# Altium PCB WX0.012.615PCB-4.2.PcbDoc (part 2 of 2)
Units mil, origin at the board's own origin, x right, y up, seen from the top; angles counter-clockwise.
Board outline 3994.73 x 11120.28 mil, 2 copper layers (Top Layer, Bottom Layer), stack 62.249 mil thick; 155 components, 122 nets, 589 pads, 368 vias.
Unrouted connection lines stored in the file: 340.
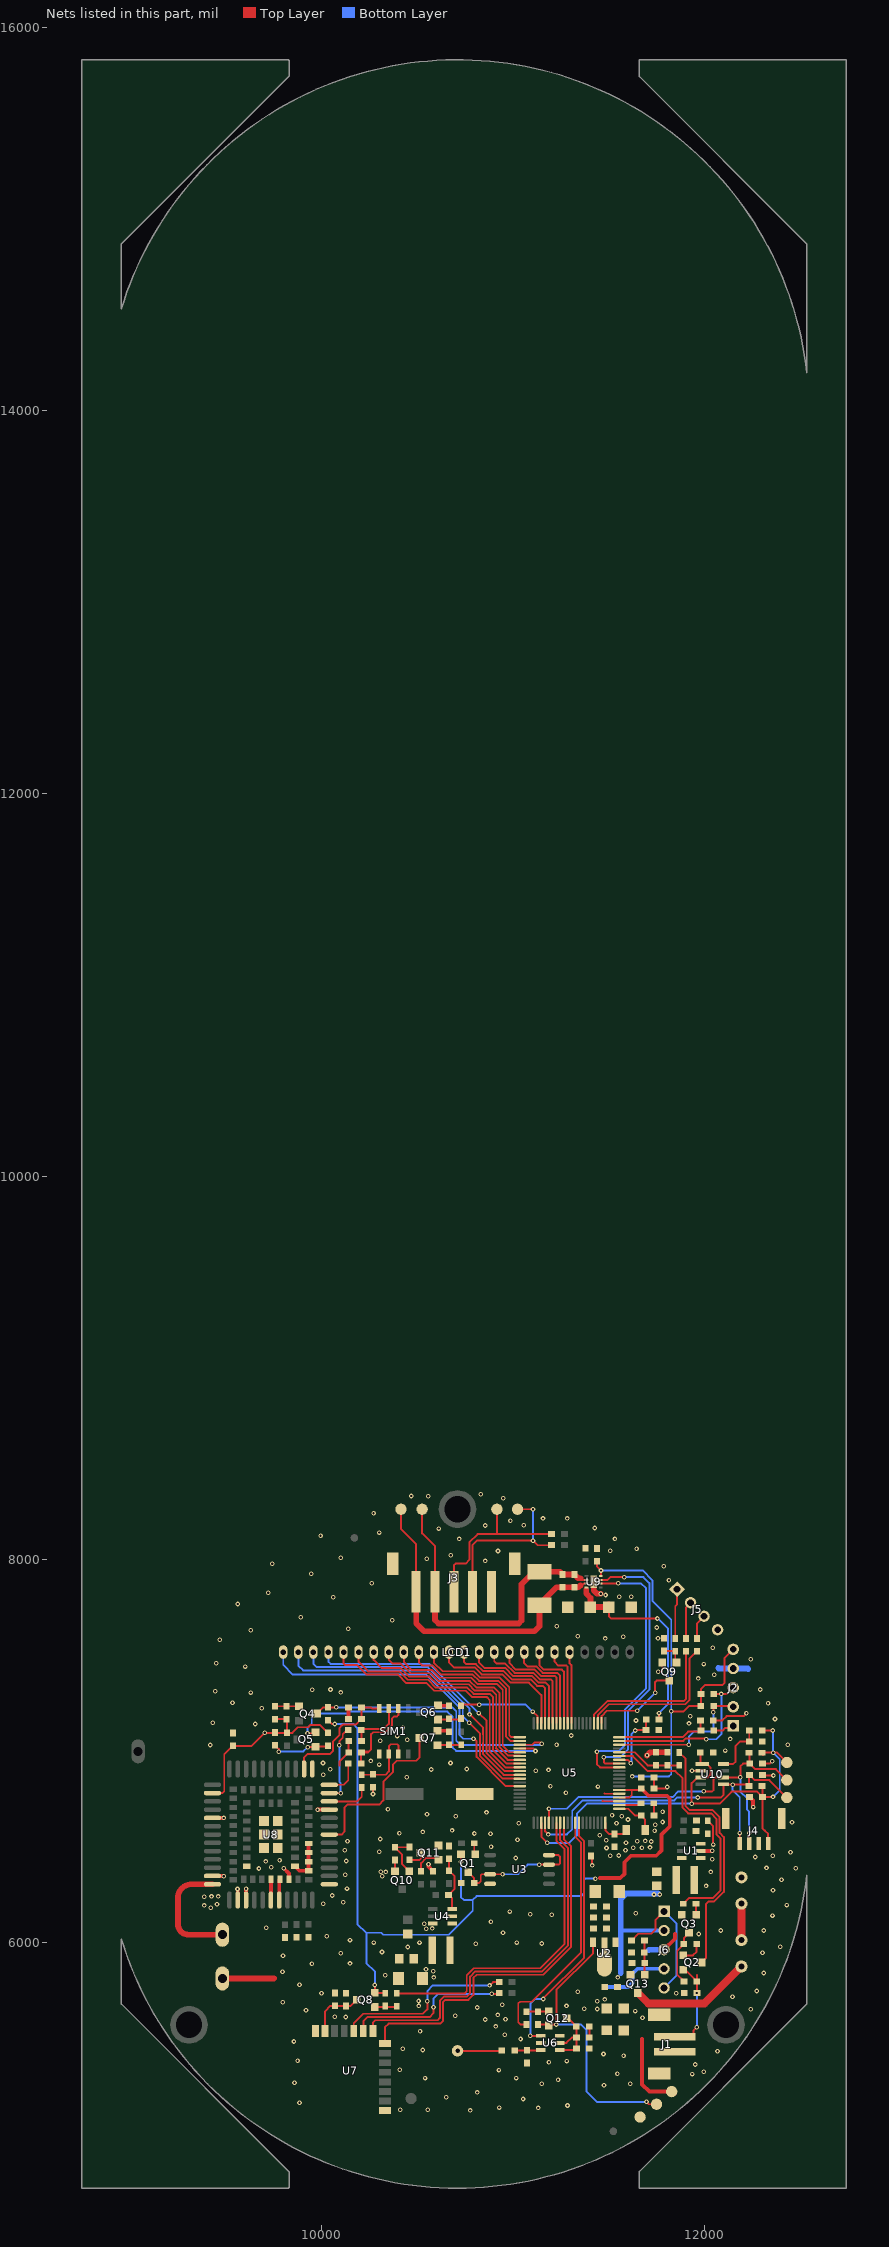
[diagram p2: the nets of this part, all layers, seen from the top]

## Via types
v1: diameter 24, hole 12, Top Layer to Bottom Layer, tented both sides, 368 vias

## Nets (pads, with @x,y where several pads share a name; then routed paths per layer and width w, separated by ;. In a path a pad name is that pad's centre, name@x,y a point inside that pad or via, vN(x,y) a via of type N, cw(c..) or ccw(c..) an arc to the next point about the centre after c; other vN are vias at no path point) (continued)
GND: C1.1 C2.2 C3.1 C4.2 C5.2 C6.2 C7.2 C9.2 C10.2 C11.2 C12.1 C13.1 C14.1 C15.2 C16.2 C17.1 C18.2 C19.2 C21.2 C22.1 C23.2 C24.1 C25.1 C26.1 C27.2 C28.2 C29.1 C32.2 C33.2 C34.1 C35.2 C36.1 C37.2 C38.2 C39.1 C40.2 C41.1 C42.1 C43.2 C44.2 C47.2 C48.2 C50.2 G.1 J1.2 J1.3 J1.4 J2.4 J3.1 J3.6 J3.7 J4.2 J4.5 J4.6 J5.4 J6.3 Q3.2 Q6.2 Q7.2 Q9.2 Q11.2 R9.1 R11.1 R12.2 R22.1 R26.2 R34.2 R40.1 R41.1 R42.2 R47.1 R50.1 R51.1 SIM1.1 U1.2 U2.1 U3.4 U4.2 U5.63 U5.65 U6.2 U6.6 U7.1 U7.15 U8.1 U8.10 U8.27 U8.34 U8.36 U8.37 U8.40 U8.41 U8.45 U8.46 U8.47 U8.48 U8.70 U8.71 U8.72 U8.73 U8.88 U8.89 U8.90 U8.91 U8.92 U8.93 U8.94 U8.95 U9.9 U10.2 W1.2 | length 3197.1
  Top Layer w10: v1@9490.02,6344.98 v1(9491,6344) ; 10096,6922 10096,6943.57 C42.1@10143,6990.57 ; C42.1@10140,6993.57 10143,6996.57 C39.1@10143,7055.43 ; v1(10270,6773) C41.1@10270,6809 ; C28.2@11399.51,5559 11400.51,5558 C27.2@11400.51,5502 ; R50.1@11408,6449 11415,6442 v1(11415,6400) ; 11470,6737 11471.64,6735.36 U5.63@11556.84,6735.36 ; 11480,6775 11480.27,6774.73 U5.65@11556.84,6774.73 ; C13.1@11737,6725 11737,6661 C12.1@11738,6660 ; C14.1@11738,6860 C17.1@11738,6803 11800,6803 v1(11807,6810) ; v1(11760,7412) 11777,7412 11781,7416 Q9.2@11781,7460 ; v1(11936.72,6894.72) U10.2@11982.94,6894.72 ; R51.1@12019,6633 12047,6605 v1(12047,6509) ; C24.1@12047.86,7158 12095,7158 12117,7180 12206,7180 v1(12221,7195) ; C36.1@12304.49,6873.33 12307.82,6870 v1(12362,6870) ; C33.2@12305,6932 12343,6932 v1(12356,6945)
  Top Layer w20: U8.34@9431.42,6344.98 v1@9490.02,6344.98 ; U8.27@9431.42,6648.13 v1(9490,6648.13) ; v1(9562,6277) 9563.31,6275.69 U8.36@9563.31,6219 ; U8.37@9606.61,6219 9606.61,6277.61 v1(9607,6278) ; U8.40@9736.54,6219 U8.70@9736.54,6327.27 ; U8.41@9779.84,6219 9779.84,6323.33 U8.71@9783.78,6327.27 ; v1(9804,6385) 9831.02,6357.98 U8.72@9831.02,6327.27 ; U8.73@9862.52,6396.17 9886.14,6372.54 U8.45@9933.39,6372.54 U8.47@9933.39,6467.03 U8.48@9933.39,6514.28 ; v1(9980.56,6691.44) U8.10@10041.65,6691.44 ; C43.2@10142.49,7166.14 C44.2@10142.49,7225 ; 10563,6391 10560,6394 ; R9.1@10584,6370 v1@10560,6394 ; Q7.2@10607.24,7103.4 10660.6,7103.4 R26.2@10666,7098 ; Q6.2@10609.24,7237.4 10612.65,7234 R22.1@10667,7234 ; J6.3@11791,5960 11848,6017 11848,6043 ; U1.2@11982,6476 v1(12042,6476) ; C35.2@12237.49,6758 12256,6739.49 v1(12256,6705) ; 10560,6394 v1(10560,6406) v1@10560,6394
  Top Layer w30: W1.2@9483,5809.65 9751.65,5809.65 9753,5811 ; U9.9@11423,7882 11423,7837 11440.04,7819.96 v1(11459.78,7819.96) ; v1(11702,6975) 11718,6991 R12.2@11809,6991
  Bottom Layer w30: 11710,5957 11713,5960 J6.3@11791,5960 ; 12074,7431 12076,7429 J2.4@12152,7429 12228,7429 12231,7426
  other v1: 10778,5120 10413,5124 10556,5124 11133,5133 10929,5135 11286,5146 9886,5160 11054,5180 10653,5189 10814,5214 11477,5251 11152,5259 11614,5259 9860,5265 11237,5281 10542,5289 11019,5289 11938,5310 11547,5312 11998,5322 10928,5331 10409,5333 11953,5360 11189,5372 11282,5378 9876,5379 11579,5405 11474,5415 12070,5429 10530,5436 10426,5443 9857,5480 11041,5493 10958,5516 10516,5534 10911,5559 10856,5595 10962,5597 11678,5604 10128,5608 10070,5609 10699,5615 10922,5619 11640,5639 9920,5643 12244,5649 11374,5651 10814,5658 10509,5666 11281,5666 10946,5672 9798,5685 10508,5692 12148,5714 10001,5732 11854,5732 11339,5740 12275,5744 9886,5776 10334,5827 12311,5838 9797,5844 9951,5886 10150,5888 9800,5928 10102,5941 12305,5944 10317,5948 10452,5974 12398,5975 10807,5991 11152,5992 10274,5997 10513,5997 11021,5997 10150,6010 10028,6030 11972,6042 10949,6048 12087,6060 12311,6060 9712,6074 10886,6106 12357,6138 11204,6143 11092,6145 11642,6150 10984,6159 9423,6179 9388,6191 12432,6193 9455,6197 10010,6200 10114,6208 9388,6236 9426,6238 9462,6238 10057,6243 12360,6270 10134,6279 12010,6293 12404,6326 10125,6351 12034,6366 9674,6384 12478,6385 12326,6387 9738,6390 9709,6421 10130,6423 9782,6427 12043,6433 11016,6439 12267,6444 12359,6450 11509,6451 11554,6452 12451,6469 10302,6472 10123,6480 11589,6480 11490,6491 11630,6492 11675,6492 11717,6494 10887,6497 11592,6519 11724,6525 11651,6526 10137,6527 11692,6528 11489,6532 11025,6534 10308,6538 11455,6557 10884,6566 10800,6567 10408,6568 10530,6575 11741,6581 10683,6583 11744,6612 11031,6620 11542,6620 12459,6625 11783,6627 11602,6640 10703,6657 11570,6657 11519,6662 10552,6668 10863,6677 11783,6680 10348,6693 11278,6780 11445,6812 11197,6813 10447,6860 10010,6874 11121,6894 11187,6899 10574,6901 10046,6903 10760,6904 10303,6927 10009,6935 10675,6935 10259,6946 12111,7000 9420,7029 11229,7030 12437,7030 10308,7052 10449,7057 12137,7061 10397,7076 11306,7079 10426,7119 9655,7139 11921,7142 9432,7145 11644,7157 12370,7165 11927,7180 9688,7221 12334,7248 9536,7250 9631,7303 10102,7304 9446,7310 9953,7318 10048,7319 12293,7319 11970,7377 12053,7396 9603,7439 11998,7452 9451,7457 12243,7478 12045,7537 9470,7579 11484,7586 11759,7587 11578,7595 11339,7597 9631,7629 10140,7637 11753,7643 11230,7649 10370,7681 9892,7696 9563,7766 10063,7801 11556,7803 11619,7803 11485,7813 9722,7825 10263,7874 11816,7890 9947,7924 11789,7963 9743,7976 10856,7991 10551,8002 10101,8007 10676,8021 10923,8043 11510,8044 11647,8055 10721,8106 11534,8106 9996,8122 10303,8139 10613,8160 11428,8163 10857,8176 11058,8178 10988,8201 11158,8213 11285,8213 10273,8240 10951,8319 10558,8329 10470,8330 10833,8339
GPRS_RST: R20.1 U5.19 | length 462.8
  Top Layer w10: R20.1@10730,7235 10735,7240 v1(10825,7240) ; v1(11104,7204) 11129.68,7178.32 U5.19@11129.68,7142.84
  Bottom Layer w10: v1(10825,7240) 11068,7240 v1(11104,7204)
KEY: U5.53 U6.1 | length 1320.3
  Top Layer w10: v1(11092.2,5509.8) U6.1@11146,5509.8 ; v1(11160,5702) 11160,5706 11373,5919 11373,6527.25 11346.21,6554.04 U5.53@11346.21,6623.16
  Bottom Layer w10: v1(11092.2,5509.8) 11092.2,5678.2 11116,5702 v1(11160,5702)
Key_On: R15.2 U5.52 | length 1273.7
  Top Layer w10: R15.2@11071,5569 11040,5569 11029,5580 11029,5679 11038,5688 11100.04,5688 11356,5943.96 11356,6520.21 11326.53,6549.68 U5.52@11326.53,6623.16
MCU_RXD1: U5.48 U7.9 | length 1991.5
  Top Layer w10: U7.9@10269.4,5535.93 10269.4,5578.4 10282,5591 10607,5591 10619,5603 10619,5694.04 10639.96,5715 10760.96,5715 10777,5731.04 10777,5818.99 10804.01,5846 11153,5846 11288,5981 11288,6492.04 11247.79,6532.25 U5.48@11247.79,6623.16
MCU_RXD4: Q4.3 R18.1 U5.23 | length 1482.1
  Top Layer w10: Q4.3@9977.49,7193.4 10010.09,7226 R18.1@10035,7226 v1(10078,7226) ; U5.23@11037.16,7030.64 11101.95,7030.64 11112.86,7041.54 11144.46,7041.54 v1(11151,7035)
  Bottom Layer w10: v1(10078,7226) 10685,7226 10705,7206 10705,7051 10726,7030 11146,7030 v1(11151,7035)
MCU_TXD1: U5.49 U7.8 | length 2006.4
  Top Layer w10: U7.8@10332,5469 10332,5554 10352,5574 10622.34,5574 10636,5587.66 10636,5687 10647,5698 10768,5698 10794,5724 10794,5811.95 10811.05,5829 11160.04,5829 11305,5973.96 11305,6499.08 11267.47,6536.61 U5.49@11267.47,6623.16
MCU_TXD4: Q5.2 U5.24 | length 1583.1
  Top Layer w10: v1(9928,7090) 9963.84,7090 Q5.2@9969.24,7095.4 ; U5.24@11037.16,7010.95 11106.05,7010.95 v1(11119,6998)
  Bottom Layer w10: v1(9928,7090) 9928,7118.75 9950,7140.75 9950,7171 9972,7193 10131,7193 10142,7204 10659,7204 10686,7177 10686,7016 10704,6998 v1(11119,6998)
MOTO_AD: C19.1 R48.1 U5.74 | length 361.4
  Top Layer w10: U5.74@11556.84,6951.9 11599.69,6951.9 v1(11617.31,6934.28) ; v1(11640,7105) 11642,7107 C19.1@11696.51,7107 11696.51,7162.51 R48.1@11697,7163
  Bottom Layer w10: v1(11617.31,6934.28) 11620,6936.97 11620,7085 v1(11640,7105)
MOTO_C: C45.2 C46.2 J3.5 M_C.1 TVS1.1 U9.3 | length 1723.9
  Top Layer w10: M_C.1@10416,8261 10416,8158 10495.58,8078.42 J3.5@10495.58,7829 ; 11353.75,7863 11363,7863 11372.16,7872.16 U9.3@11385.59,7872.16
  Top Layer w30: J3.5@10495.58,7829 10495.58,7663.42 10536,7623 11113,7623 11140,7650 TVS1.1@11140,7759 ; TVS1.1@11120,7760 11140,7780 11155,7780 11228.49,7853.49 C45.2@11322,7853.49 11344.24,7853.49 11353.75,7863
MOTO_O: C45.1 C46.1 J3.4 M_O.1 TVS1.2 U9.2 | length 1656.5
  Top Layer w10: M_O.1@10527,8261 10527,8135 10594,8068 J3.4@10594,7829 ; 11358.26,7904.5 11358.26,7894.74 11361.16,7891.84 U9.2@11385.59,7891.84
  Top Layer w30: J3.4@10594,7829 10594,7682 10612,7664 11031,7664 11046,7679 11046,7869 11111,7934 TVS1.2@11140,7934 11246,7934 C46.1@11260,7920 C45.1@11322.49,7920 ; TVS1.2@11125,7940 TVS1.2@11129.5,7944.5 ; C45.1@11322,7920.49 C45.1@11322.49,7920 ; 11353.76,7900 11342.49,7900 C45.1@11322.49,7920
NetC8_1: C8.1 Q13.3 | length 644.6
  Top Layer w40: Q13.3@11653,5733.76 11707.76,5679 12002,5679 C8.1@12195,5872
NetC8_2: C8.2 C10.1 | length 190.2
  Top Layer w40: C8.2@12195,6009.8 C10.1@12195,6200
NetC11_1: C11.1 Q1.3 U3.3 U3.7 U3.8 | length 673.8
  Top Layer w10: Q1.3@10767,6363.76 10798.49,6332.26 C11.1@10798.49,6309 10824,6309 10833,6318 10833,6348 10839,6354 U3.3@10882,6354 v1(10947,6354) ; v1(11139,6404) U3.7@11189.09,6404 11241,6404 11248,6411 11248,6445 11239,6454 U3.8@11189.09,6454
  Bottom Layer w10: v1(10947,6354) 11028,6354 11078,6404 v1(11139,6404)
NetC13_2: C13.2 U5.62 | length 117
  Top Layer w10: U5.62@11556.84,6715.68 11660.68,6715.68 C13.2@11670,6725
NetC20_2: C20.2 R6.1 R11.2 U4.3 | length 295.1
  Top Layer w10: R11.2@10667,6435 R6.1@10667,6373 10695,6345 10695,6276.49 C20.2@10664.51,6246 10683,6227.51 U4.3@10683,6171.8
NetC26_2: C26.2 C27.1 C28.1 Q12.3 U6.4 U6.5 | length 373.4
  Top Layer w10: U6.4@11246,5435 11324,5435 C26.2@11333,5444 11332.51,5444.49 C27.1@11332.51,5502 ; U6.5@11246,5472.4 11280.4,5472.4 11310,5502 C27.1@11332.51,5502 ; Q12.3@11282.24,5601 11290.51,5601 C28.1@11332.51,5559 C27.1@11332.51,5502 ; C27.1@11333.51,5502 C27.1@11332.51,5502
NetC29_2: C29.2 R38.2 U6.3 | length 136.8
  Top Layer w10: R38.2@11010,5433 11144,5433 U6.3@11146,5435
NetC30_2: C30.2 Q4.1 R16.2 | length 126.3
  Top Layer w10: C30.2@9757,7231.51 9882.29,7231.51 Q4.1@9883,7230.8
NetC31_2: C31.2 Q5.1 R17.2 | length 311.5
  Top Layer w10: C31.2@9758,7028 9778,7008 v1(9778,6994) ; v1(9929,7018) 9966.65,7018 Q5.1@9969.24,7020.6 10028.6,7020.6 R17.2@10034,7026
  Bottom Layer w10: v1(9778,6994) 9779.46,6995.46 9906.46,6995.46 v1(9929,7018)
NetC37_1: C37.1 C38.1 Q8.3 U7.14 | length 277
  Top Layer w10: U7.14@10019.4,5535.93 10019.4,5638.4 10047.51,5666.51 C37.1@10071,5666.51 ; 10087.28,5666.51 10129.49,5666.51 C38.1@10130,5666 10152.87,5666 Q8.3@10185,5698.13
NetC48_1: C48.1 Q13.1 R46.2 R47.2 | length 179.8
  Top Layer w10: R46.2@11688,6007 11688,5830.65 Q13.1@11690.4,5828.24
NetC49_2: C49.2 R49.1 R51.2 U1.3
NetC_1: C.1 J3.2 R1.2 | length 922.2
  Top Layer w10: J3.2@10790.85,7829 10790.85,8074.85 10812.88,8096.88 v1(11106.12,8096.88) 11130,8073 R1.2@11203,8073 ; C.1@11025,8261 v1(11106,8261)
  Bottom Layer w10: v1(11106,8261) 11106,8097 v1(11106.12,8096.88)
NetJ2_1: J2.1 R3.2 | length 123.4
  Top Layer w10: R3.2@12051,7104 12096,7104 12109,7117 12152,7117 J2.1@12164,7129
NetJ3_3: J3.3 O.1 R39.2 | length 900.5
  Top Layer w10: J3.3@10692.43,7829 10692.43,7967.43 10702,7977 10754,7977 10773.85,7996.85 10773.85,8087.85 10817,8131 10918,8131 ; O.1@10917,8261 10917,8132 10918,8131 ; R39.2@11203,8131 10918,8131
NetJ5_1: J5.1 R31.1 | length 261.4
  Top Layer w10: R31.1@11849,7586 11849,7755 11858.58,7764.58 J5.1@11858.58,7843.42
NetJ5_2: J5.2 R32.1 | length 196.6
  Top Layer w10: R32.1@11905.5,7586 11905.5,7748.92 J5.2@11929.29,7772.71
NetJ5_3: J5.3 R33.1 | length 131.7
  Top Layer w10: R33.1@11962,7586 11962,7664 J5.3@12000,7702
NetJ6_1: J6.1 J6.5 R46.1 | length 715.9
  Top Layer w10: R46.1@11621,6007 11657,6043 11723,6043 11745,6065 11745,6114 J6.1@11791,6160
  Bottom Layer w10: J6.5@11791,5760 11856,5825 11856,6095 J6.1@11791,6160
NetKT1_1: KT1.1 R38.1 | length 232.1
  Top Layer w10: KT1.1@10711.57,5431.34 10941.34,5431.34 R38.1@10943,5433
NetL1_2: L1.2 U4.1
NetL2_2: L2.2 U1.1
NetQ1_1: Q1.1 R2.2 | length 60
  Top Layer w10: R2.2@10799,6516 10799,6463.65 Q1.1@10804.4,6458.24
NetQ2_1: Q2.1 R10.2 | length 116.4
  Top Layer w10: Q2.1@11891.76,5930.4 11941.4,5930.4 11961,5950 R10.2@11961,5989
NetQ2_3: Q2.3 R7.1 | length 1328.7
  Top Layer w10: R7.1@11870,6990 11903,6957 11903,6709.75 11922.75,6690 12042.04,6690 12081,6651.04 12081,6569.52 12103,6547.52 12103,6262 12053,6212 12024,6212 12009,6197 12009,5915.76 Q2.3@11986.24,5893
NetQ3_1: Q3.1 R13.2 | length 57.9
  Top Layer w10: R13.2@11958,6200 11958.4,6199.6 Q3.1@11958.4,6142.24
NetQ3_3: Q3.3 R8.1 R10.1 | length 294.1
  Top Layer w10: R8.1@11895,5794 11859.76,5829.24 11859.76,5955.37 11893.38,5989 R10.1@11894,5989 11894,6020.76 Q3.3@11921,6047.76
NetQ6_1: Q6.1 R20.2 R22.2 | length 123
  Top Layer w10: Q6.1@10609.24,7162.6 10724.6,7162.6 R20.2@10730,7168
NetQ7_1: Q7.1 R24.2 R26.1 | length 124.8
  Top Layer w10: Q7.1@10607.24,7028.6 10728.6,7028.6 R24.2@10731,7031
NetQ8_1: Q8.1 R25.1 R27.2 | length 116.3
  Top Layer w10: Q8.1@10279.49,5660.72 10389.72,5660.72 R27.2@10394,5665
NetQ9_1: Q9.1 R31.2 R34.1 | length 121.2
  Top Layer w10: R34.1@11790,7520 11848,7520 R31.2@11849,7519 11849,7466.8 Q9.1@11855.8,7460
NetQ10_1: Q10.1 R35.1 R36.2 | length 233.4
  Top Layer w10: Q10.1@10459.4,6369.24 10422,6406.65 10422,6457 10384,6495 10459,6495 R36.2@10460,6496
NetQ11_1: Q11.1 R37.1 | length 156.6
  Top Layer w10: R37.1@10521,6369 10521,6412.25 10546.75,6438 10603.84,6438 Q11.1@10612.24,6429.6 Q11.1@10620.24,6429.6
NetQ11_3: Q11.3 R36.1 | length 96.7
  Top Layer w10: R36.1@10460,6429 10513.7,6429 10525.76,6441.05 Q11.3@10525.76,6467
NetQ12_1: Q12.1 R14.1 R15.1 | length 117.8
  Top Layer w10: R15.1@11071,5636 R14.1@11132,5636 11185.35,5636 Q12.1@11187.76,5638.4
NetR40_2: R40.2 R41.2 R48.2 U9.4 | length 1060.9
  Top Layer w10: R41.2@11502,7750 11502,7702 11514,7690 v1(11756,7690) ; R48.2@11764,7163 v1(11764,7196)
  Top Layer w30: 11383.87,7840.8 11383.87,7820.13 11406.11,7797.89 R40.2@11406.11,7765 ; R40.2@11406.11,7750 R41.2@11502,7750 ; R41.2@11501,7765 R41.2@11502,7764
  Bottom Layer w10: v1(11756,7690) 11760,7690 11811,7639 11811,7243 v1(11764,7196)
NetR42_1: R42.1 R43.1 U10.8 | length 289
  Top Layer w10: U10.8@12101.06,6930.15 12151.15,6930.15 12164,6943 12164,7025 12186.33,7047.33 R42.1@12235.86,7047.33 R43.1@12235.86,7105
NetR44_2: R44.2 U7.10 | length 864.7
  Top Layer w10: U7.10@10219.4,5535.93 10219.4,5586.4 10241,5608 10566,5608 10586,5628 v1(10586,5659) ; v1(10891,5729) 10925,5729 R44.2@10929,5733
  Bottom Layer w10: v1(10586,5659) 10586,5703 10612,5729 v1(10891,5729)
NetR45_2: R45.2 U7.11 | length 944
  Top Layer w10: U7.11@10169.4,5535.93 10169.4,5574.4 10220,5625 10531,5625 10554,5648 v1(10554,5690) ; v1(10879,5773) 10897,5791 R45.2@10929,5791
  Bottom Layer w10: v1(10554,5690) 10554,5744 10583,5773 v1(10879,5773)
NetU8_35: U8.35 W1.1 | length 622
  Top Layer w30: U8.35@9431.42,6301.68 9322.01,6301.68 ccw(c9322.01,6230.66) 9251,6230.66 9251,6093 ccw(c9306,6093) 9306,6038 W1.1@9483,6038
OPEN: U5.72 U9.6 | length 1462
  Top Layer w10: v1(11440,6994) 11440,6929 11456.47,6912.53 U5.72@11556.84,6912.53 ; U9.6@11460.4,7872.16 11501.16,7872.16 11503,7874 v1(11551,7874)
  Bottom Layer w10: v1(11440,6994) 11444,6998 11556,6998 11586,7028 11586,7214.08 11696.68,7324.76 11696.68,7847.32 11670,7874 v1(11551,7874)
PWRKEY: Q7.3 U8.7 | length 894.6
  Top Layer w10: U8.7@10041.65,6561.52 10106.52,6561.52 10121,6576 10121,6702 10136.75,6717.75 10302.75,6717.75 10324.5,6739.5 10324.5,6838.46 10374,6887.96 10374,6926 10395,6947 10497,6947 10512.76,6962.76 Q7.3@10512.76,7066
RST: C24.2 R3.1 U5.80 | length 494.4
  Top Layer w10: U5.80@11556.84,7070.01 11887.01,7070.01 11916,7099 11979.71,7099 11980.86,7100.14 C24.2@11980.86,7158
RXD0: R33.2 U5.3 | length 824.2
  Top Layer w10: U5.3@11444.64,7142.84 11444.64,7184.68 11501.96,7242 11901,7242 11922.5,7263.5 11922.5,7479.5 R33.2@11962,7519
S0: LCD1.5 U5.10 | length 376.2
  Top Layer w10: LCD1.5@11297.06,7515 11297.06,7455.94 11306.84,7446.16 U5.10@11306.84,7142.84
S1: LCD1.6 U5.11 | length 424.7
  Top Layer w10: LCD1.6@11218.32,7515 11218.32,7464.68 11239,7444 11280,7444 11287.16,7436.84 U5.11@11287.16,7142.84
S2: LCD1.7 U5.12 | length 480.2
  Top Layer w10: LCD1.7@11139.58,7515 11139.58,7446.42 11163,7423 11257,7423 11267.47,7412.53 U5.12@11267.47,7142.84
S3: LCD1.8 U5.13 | length 523.2
  Top Layer w10: LCD1.8@11060.84,7515 11059,7513.16 11059,7457 11076,7440 11121.96,7440 11155.96,7406 11233,7406 11247.79,7391.21 U5.13@11247.79,7142.84
S4: LCD1.9 U5.14 | length 573.6
  Top Layer w10: LCD1.9@10982.1,7515 10982.1,7457.9 11017,7423 11114.92,7423 11148.92,7389 11221,7389 11228.1,7381.9 U5.14@11228.1,7142.84
S5: LCD1.10 U5.15 | length 615.1
  Top Layer w10: LCD1.10@10903.36,7515 10903.36,7467.64 10916,7455 10960.96,7455 11009.96,7406 11107.88,7406 11141.88,7372 11198,7372 11208.42,7361.58 U5.15@11208.42,7142.84
S6: LCD1.11 U5.16 | length 665.3
  Top Layer w10: LCD1.11@10824.62,7515 10824.62,7459.38 10852,7432 10959.92,7432 11002.92,7389 11100.83,7389 11134.83,7355 11172,7355 11188.73,7338.27 U5.16@11188.73,7142.84
S7: LCD1.12 U5.17 | length 715.6
  Top Layer w10: LCD1.12@10745.88,7515 10745.88,7462.12 10756,7452 10807.96,7452 10844.96,7415 10952.88,7415 10995.88,7372 11093.79,7372 11127.79,7338 11157,7338 11169.05,7325.95 U5.17@11169.05,7142.84
S8: LCD1.13 U5.18 | length 754.7
  Top Layer w10: LCD1.13@10667.14,7515 10667.14,7459.86 10692,7435 10800.92,7435 10837.92,7398 10945.83,7398 10988.83,7355 11084,7355 11149.36,7289.64 U5.18@11149.36,7142.84
S9: LCD1.14 U5.21 | length 812.6
  Top Layer w10: LCD1.14@10588.4,7515 10588.4,7459.6 10633.54,7414.46 10797.42,7414.46 10830.88,7381 10932,7381 10982,7331 10982,7080 10991.99,7070.01 U5.21@11037.16,7070.01
S10: LCD1.15 U5.22 | length 898.4
  Top Layer w10: LCD1.15@10509.66,7515 10509.66,7461.34 10526,7445 10578.96,7445 10626.5,7397.46 10790.38,7397.46 10823.83,7364 10924.96,7364 10965,7323.96 10965,7072.96 10987.64,7050.32 U5.22@11037.16,7050.32
S11: LCD1.16 U5.25 | length 1024.6
  Top Layer w10: LCD1.16@10430.92,7515 10430.92,7463.08 10473.04,7420.96 10578.96,7420.96 10619.46,7380.46 10783.33,7380.46 10816.79,7347 10917.92,7347 10948,7316.92 10948,7025 10981.73,6991.27 U5.25@11037.16,6991.27
S12: LCD1.17 U5.26 | length 1099.8
  Top Layer w10: LCD1.17@10352.18,7515 10352.18,7474.82 10372,7455 10414.96,7455 10466,7403.96 10571.92,7403.96 10612.42,7363.46 10776.29,7363.46 10809.75,7330 10900.92,7330 10931,7299.92 10931,7017.96 10975.6,6973.36 11037.16,6973.36 U5.26@11037.16,6971.58
S13: LCD1.18 U5.27 | length 1187.2
  Top Layer w10: LCD1.18@10273.44,7515 10273.44,7473.56 10316.04,7430.96 10414.96,7430.96 10458.96,7386.96 10564.88,7386.96 10605.38,7346.46 10769.25,7346.46 10802.71,7313 10893.88,7313 10914,7292.88 10914,7013.54 10913,7012.54 10913,7011.92 10973.02,6951.9 U5.27@11037.16,6951.9
S14: LCD1.19 U5.28 | length 1277.4
  Top Layer w10: LCD1.19@10194.7,7515 10194.7,7463.3 10244.04,7413.96 10407.92,7413.96 10451.92,7369.96 10557.83,7369.96 10598.33,7329.46 10762.21,7329.46 10795.67,7296 10882.12,7296 10882.12,7294.88 10897,7280 10897,7020.58 10896,7019.58 10896,7004.88 10968.66,6932.21 U5.28@11037.16,6932.21
S15: LCD1.20 U5.29 | length 1365.5
  Top Layer w10: LCD1.20@10115.96,7515 10115.96,7455.04 10123,7448 10185.96,7448 10237,7396.96 10400.88,7396.96 10444.88,7352.96 10550.79,7352.96 10591.29,7312.46 10755.17,7312.46 10788.63,7279 10866.12,7279 10866.12,7277.88 10880,7264 10880,7027.62 10879,7026.62 10879,6995 10961.47,6912.53 U5.29@11037.16,6912.53
S16: LCD1.21 U5.30 | length 1386.4
  Top Layer w10: v1(10822.04,7196) 10863,7155.04 10863,7034.66 10862,7033.66 10862,6987.96 10957.12,6892.84 U5.30@11037.16,6892.84
  Bottom Layer w10: LCD1.21@10037.22,7515 10037.22,7464.78 10049,7453 10565.04,7453 v1(10822.04,7196)
S17: LCD1.22 U5.31 | length 1479.3
  Top Layer w10: v1(10774.25,7189) 10845,7118.25 10845,7083.3 10846,7082.3 10846,7041.7 10845,7040.7 10845,6980.92 10952.76,6873.16 U5.31@11037.16,6873.16
  Bottom Layer w10: LCD1.22@9958.48,7515 9958.48,7454.52 9977,7436 10557.08,7436 10744.58,7248.5 10745.5,7248.5 10774.25,7219.75 v1(10774.25,7189)
S18: LCD1.23 U5.32 | length 1571.1
  Top Layer w10: v1(10773,7145) 10773.47,7145 10828,7090.47 10828,6973.88 10948.4,6853.47 U5.32@11037.16,6853.47
  Bottom Layer w10: LCD1.23@9879.74,7515 9879.74,7444.26 9905,7419 10550.04,7419 10739,7230.04 10739,7179 v1(10773,7145)
S19: LCD1.24 U5.34 | length 1694.5
  Top Layer w10: v1@10797,7062 10811,7048 10811,6966.83 10963.73,6814.1 U5.34@11037.16,6814.1
  Bottom Layer w10: LCD1.24@9801,7515 9801,7448 9852,7397 10548,7397 10722,7223 10722,7081 10741,7062 v1(10795,7062)
SET: Q9.3 U5.2 | length 501.1
  Top Layer w10: U5.2@11464.32,7142.84 11464.32,7180.32 11492,7208 v1(11650,7208) ; v1(11744,7302) 11744,7358 11751.51,7365.51 Q9.3@11818.4,7365.51
  Bottom Layer w10: v1(11650,7208) v1(11744,7302)
SIM_CLK: C42.2 R29.2 SIM1.6 | length 468.6
  Top Layer w10: R29.2@10207.86,6937.71 C42.2@10207.86,6990.57 ; C42.2@10210,6990.57 10244.57,6990.57 10250.57,6996.57 ; C42.2@10210,6996.57 10250.57,6996.57 ; SIM1.6@10403,7219.22 10403,7186 10395,7178 10379,7178 10370,7169 10370,7132.96 10333.04,7096 10270,7096 10260,7086 10260,7006 10250.57,6996.57
SIM_DATA: C41.2 R30.2 SIM1.2 SIM1.3 | length 382.2
  Top Layer w10: R30.2@10211.14,6873.86 10335.86,6873.86 10353,6891 SIM1.2@10353,6983 10353,7024 10362,7033 10397,7033 10403,7027 SIM1.3@10403,6983
SIM_RST: C39.2 R28.2 SIM1.7 | length 293.1
  Top Layer w10: R28.2@10207.86,7108.29 R28.2@10210,7108.29 ; C39.2@10210,7055.43 10210,7113 10326,7113 10353,7140 SIM1.7@10353,7219.22
SIM_VDD: C43.1 C44.1 SIM1.8 U8.14 | length 647.5
  Top Layer w10: U8.14@9909.76,6904.04 9909.76,6964.76 9928,6983 10046,6983 10062,6999 10062,7048.75 10095,7081.75 10095,7118.4 10107.8,7131.2 10112.39,7135.79 10179.13,7135.79 C43.1@10209.49,7166.14 ; C43.1@10206.49,7169.14 10209.49,7172.14 C44.1@10209.49,7225 10261,7225 10266.78,7219.22 SIM1.8@10303,7219.22
SLEEP: U5.73 U9.7 | length 1439.5
  Top Layer w10: U9.7@11460.4,7891.83 11495.83,7891.83 11510,7906 v1(11582,7906) ; v1(11476,6966) 11476,6940 11483.79,6932.21 U5.73@11556.84,6932.21
  Bottom Layer w10: v1(11476,6966) 11561,6966 11603,7008 11603,7207.04 11713.68,7317.72 11713.68,7875.32 11683,7906 v1(11582,7906)
SWCLK: J2.2 R4.1 U5.78 | length 784.9
  Top Layer w10: U5.78@11556.84,7030.64 11922.64,7030.64 11922,7030 v1(11920,7030) ; v1(12048,7201) 12048,7231 R4.1@12050,7233 12148,7233 J2.2@12152,7229
  Bottom Layer w10: v1(11920,7030) 11920,7073 11947.5,7100.5 12042.5,7100.5 12048,7106 v1(12048,7201)
SWIO: J2.3 R5.2 U5.79 | length 877.4
  Top Layer w10: U5.79@11556.84,7050.32 11891.36,7050.32 11905.04,7064 12006.75,7064 v1(12011.53,7059.22) ; R5.2@12051,7296 v1(12090,7296) 12119,7296 J2.3@12152,7329
  Bottom Layer w10: v1(12011.53,7059.22) 12063.22,7059.22 12091,7087 12090,7088 v1(12090,7296)
TXD0: R32.2 U5.4 | length 809
  Top Layer w10: U5.4@11424.95,7142.84 11424.95,7189.04 11494.92,7259 11893.96,7259 11905.5,7270.54 R32.2@11905.5,7519
USIM_CLK: R29.1 U8.13 | length 202.4
  Top Layer w10: U8.13@10041.65,6821.36 10118.36,6821.36 10140.86,6843.86 R29.1@10140.86,6937.71
USIM_DATA: R30.1 U8.11 | length 227.3
  Top Layer w10: U8.11@10041.65,6734.75 10186.75,6734.75 10211.14,6759.14 R30.1@10211.14,6806.86
USIM_RST: R28.1 U8.12 | length 419.4
  Top Layer w10: U8.12@10041.65,6778.06 10042.71,6777 v1(10101,6777) ; v1(10094,7028) 10094,7050 10112,7068 10112,7085.43 R28.1@10140.86,7114.29
  Bottom Layer w10: v1(10094,7028) 10094,6836 10101,6829 v1(10101,6777)
VCC: 3.3V.1 C2.1 C4.1 C5.1 C6.1 C14.2 C17.2 C34.2 J2.5 Q1.2 Q8.2 Q12.2 R4.2 R5.1 R14.2 R18.2 R25.2 U2.3 U5.64 U5.66 U9.8 | length 8142
  Top Layer w10: R18.2@10035,7159 10055,7139 v1(10070,7139) ; v1(10279.49,5775.49) Q8.2@10279.49,5735.53 10282.02,5733 R25.2@10334,5733 ; v1(10729.6,6419) Q1.2@10729.6,6458.24 ; R14.2@11132,5569 Q12.2@11193.16,5569 ; Q12.2@11187.76,5563.6 Q12.2@11193.16,5569 ; U2.3@11419.94,5998.17 11419.94,5941.9 11228,5749.96 v1(11228,5569) Q12.2@11193.16,5569 ; C34.2@11441,7989 11441,7961 v1(11461,7941) 11461,7912.12 U9.8@11460.4,7911.52 ; U5.64@11556.84,6755.05 11610.05,6755.05 11622,6767 11622,6794.42 ; U5.66@11556.84,6794.42 11622,6794.42 ; C17.2@11671,6803 11662.42,6794.42 11622,6794.42 ; v1(11699,5165) 11711.75,5152.25 3.3V.1@11751.49,5152.25 ; v1(11828,7205) 11893,7205 11921,7233 R4.2@11983,7233 11983,7295 R5.1@11984,7296 11984,7322 12005,7343 12096,7343 12107,7354 12107,7484 J2.5@12152,7529
  Top Layer w20: 11455,6334 11562,6334 11584,6356 11584,6417 11618,6451 11750.16,6451 11778,6478.84 11778,6561.67 11820,6603.67 11820,6750 11806,6764 11710,6764 C17.2@11671,6803
  Bottom Layer w10: v1(10070,7139) 10167,7139 10189,7117 10189,6094 10234.5,6048.5 10312.5,6048.5 10323,6038 10665,6038 10791,6164 10791,6220 ; 10236,6044 10236,5890 10279.49,5846.51 v1(10279.49,5775.49) ; v1(10729.6,6419) 10729.6,6234.4 10744,6220 10791,6220 ; v1(11228,5569) 11356,5569 11386,5539 11386,5218 11439,5165 v1(11699,5165) ; v1(11432,6331) 11379,6331 11371,6323 11371,6254 11357,6240 10811,6240 10791,6220 ; v1(11461,7941) 11679,7941 11730,7890 11730,7883.04 11730.68,7882.36 11730.68,7781.32 11828,7684 v1(11828,7205) 11828,6877 11816,6865 v1(11625,6865)
VDD_BLE_CTL: R27.1 U5.47 | length 1684
  Top Layer w10: R27.1@10394,5732 10750,5732 10760,5742 10760,5826.04 10796.96,5863 11144,5863 11271,5990 11271,6485 11228.1,6527.9 U5.47@11228.1,6623.16
VDD_EXT: C30.1 C31.1 C40.1 R16.1 R17.1 R19.2 U8.24 | length 1017.8
  Top Layer w10: U8.24@9431.42,6778.06 9483.06,6778.06 9493,6788 9493,6980 C40.1@9538,7025 9636,7025 v1(9704,7093) R19.2@9821,7093 ; C30.1@9758,7163.51 C30.1@9757,7164.51 9818.49,7164.51 R16.1@9819,7164 9821,7162 R19.2@9821,7093 ; R17.1@10036,7095 R17.1@10034,7093 9993,7134 9943.25,7134 9931.25,7122 9878,7122 9849,7093 R19.2@9821,7093
VIN: C1.2 D1.1 D4.1 J1.1 Q2.2 R8.2 VIN.1 | length 841
  Top Layer w10: Q2.2@11891.76,5855.6 11900.4,5855.6 R8.2@11962,5794 ; J1.1@11944,5514.83 11944,5536 v1(11962,5554) ; v1(11962,5734) 11962,5828
  Top Layer w20: 11676,5493 11676,5256 11713.75,5218.25 VIN.1@11830.49,5218.25 ; VIN.1@11830.49,5209 VIN.1@11848,5209
  Bottom Layer w10: v1(11962,5554) v1(11962,5734)
VIN1: C9.1 C50.1 D1.2 J6.2 L2.1 Q13.2 U1.6 U2.2 | length 819.8
  Bottom Layer w20: 11565,6057 11568,6060 J6.2@11791,6060
  Bottom Layer w30: 11565,5838 11565,6057 11565,6225 11593,6253 v1@11759,6253
  other v1: 11548,5815 11738,6248 11768,6248
VIN_CHEAK: C25.2 R7.2 R12.1 U5.76 | length 342.8
  Top Layer w10: U5.76@11556.84,6991.27 11636.73,6991.27 11705,6923 R7.2@11870,6923 ; R7.2@11869,6935 R7.2@11870,6934
VIN_CHEAK_EN: R13.1 U5.75 | length 1340
  Top Layer w10: U5.75@11556.84,6971.58 11627.42,6971.58 11706,6893 11850,6893 11886,6857 11886,6702.7 11916.7,6672 12036,6672 12064,6644 12064,6562.47 12084.96,6541.52 12084.96,6268 12045.96,6229 11920,6229 R13.1@11891,6200
VIN_GPRS: C7.1 C21.1 D4.2 J6.4 L1.1 Q10.2 R35.2 U4.6 | length 439.5
  Top Layer w10: Q10.2@10384.6,6369.24 10384.6,6421.6 R35.2@10391,6428
  Bottom Layer w20: 11481,5765 11605,5765 11626.5,5786.5 11626.5,5835.5 11651,5860 J6.4@11791,5860
  other v1: 11442,5650 11442,5691 11481,5700 10587,5815 10584,5847 10547,5858 10548,6070 10580,6071 10538,6095 10319,6343 10337,6366 10311,6367
WY_POW: C35.1 C47.1 J4.1 POW1.1 R21.1 R23.1 R43.2 U5.43 U10.1 U10.3 | length 2774.6
  Top Layer w10: U5.43@11149.36,6623.16 11149.36,6549.64 v1(11181,6518) ; C47.1@11980.51,6989 11980.51,6930.15 U10.1@11990.82,6930.15 12014.85,6930.15 12033,6912 12033,6873 12019.28,6859.28 U10.3@11982.94,6859.28 11964.01,6859.28 11935,6830.28 v1(11935,6723) 12081.04,6723 12118.06,6760.01 ; 12118.06,6760.06 12143.5,6785.5 12276.99,6785.5 C35.1@12304.49,6758 ; R23.1@12301.86,6815.67 12304.49,6813.03 C35.1@12304.49,6758 ; R21.1@12301.86,6988.67 12302.19,6989 v1(12361,6989) 12381,6989 POW1.1@12432,6938 ; R21.1@12302,6983 R21.1@12307,6978 ; R43.2@12302.86,7105 v1(12359,7105) ; J4.1@12333.81,6514.06 12333.81,6565.19 12317,6582 12304.49,6594.51 C35.1@12304.49,6758 ; v1(12360,6758) C35.1@12304.49,6758
  Bottom Layer w10: v1(11181,6518) 11296,6518 11335,6557 11335,6671 11387,6723 v1(11935,6723) ; v1@12359,7107 12360,7106 v1@12360,6989 ; v1(12360,6758) 12395,6793 12395,6955 v1(12361,6989)
WY_SCL: C36.2 J4.4 R23.2 SCL1.1 U5.44 U10.5 | length 1944.9
  Top Layer w10: U5.44@11169.05,6623.16 11169.05,6577.95 v1(11185,6562) ; v1(11967,6755) 12089,6755 12101.06,6767.06 U10.5@12101.06,6823.85 12147.15,6823.85 v1(12149,6822) 12228.52,6822 R23.2@12234.86,6815.67 12234.86,6870.7 C36.2@12237.49,6873.33 12264.99,6845.83 12326.96,6845.83 12327.13,6846 12340.5,6846 SCL1.1@12432,6754.5 ; J4.4@12186.17,6514.06 v1(12186.17,6569.18)
  Bottom Layer w10: v1(11185,6562) 11283,6562 11311,6590 11311,6686 11365,6740 11845,6740 11860,6755 v1(11967,6755) ; v1(12149,6822) 12149,6794 12186.17,6756.82 v1(12186.17,6569.18)
WY_SDA: C33.1 J4.3 R21.2 SDA1.1 U5.45 U10.6 | length 1941.7
  Top Layer w10: U5.45@11188.73,6623.16 11188.73,6695.73 v1(11189,6696) ; v1(11998,6787) 12042,6787 12049,6794 12049,6849 12059.28,6859.28 U10.6@12101.06,6859.28 12101.77,6860 v1(12189,6860) 12189,6917 12204,6932 C33.1@12238,6932 ; R21.2@12234.86,6988.67 12238,6985.52 C33.1@12238,6932 ; J4.3@12235.39,6514.06 v1(12235.39,6567.39) ; C33.1@12235.5,6929.5 C33.1@12238.14,6926.86 ; SDA1.1@12432,6846.25 12375.25,6903 12267,6903 C33.1@12238,6932
  Bottom Layer w10: v1(11189,6696) 11282,6696 11343,6757 11835,6757 11865,6787 v1(11998,6787) ; v1(12189,6860) 12189,6785 12224,6750 12224,6691.75 12235.39,6680.36 v1(12235.39,6567.39)
XT1: C12.2 U5.61 Y1.1 | length 212.5
  Top Layer w10: U5.61@11556.84,6695.99 11603.01,6695.99 11639,6660 C12.2@11671,6660 11691.43,6639.57 Y1.1@11691.43,6585
XT2: C3.2 U5.60 Y1.2 | length 175.9
  Top Layer w10: U5.60@11484.01,6623.16 11484.01,6582.67 11502.17,6564.51 C3.2@11532,6564.51 11581.51,6564.51 Y1.2@11603,6586
pads on no net: ANT_FIX.1 MARK1.0 MARK1.1 MARK2.0 MARK2.1 SIM1.4 SIM1.5 U5.1 U5.5 U5.40 U5.41 U5.42 U5.46 U5.55 U5.56 U5.57 U5.58 U5.59 U5.67 U5.68 U5.77 U7.2 U7.3 U7.4 U7.5 U7.6 U7.7 U7.12 U7.13 U8.2 U8.3 U8.4 U8.5 U8.6 U8.8 U8.9 U8.16 U8.19 U8.20 U8.21 U8.22 U8.23 U8.25 U8.26 U8.28 U8.29 U8.30 U8.31 U8.32 U8.33 U8.38 U8.39 U8.44 U8.49 U8.50 U8.51 U8.52 U8.53 U8.54 U8.55 U8.56 U8.57 U8.58 U8.59 U8.60 U8.61 U8.62 U8.63 U8.64 U8.65 U8.66 U8.67 U8.68 U8.69 U8.74 U8.75 U8.76 U8.77 U8.78 U8.79 U8.80 U8.81 U8.82 U8.83 U8.84 U8.85 U8.86 U8.87 U8.96 U8.97 U8.98 U8.99 U8.100 U8.101 U8.102 U8.103 U8.104 U8.105 U8.106 U8.107 U8.108 U8.109 U10.4 U10.7

## Polygon pours and split planes (outlines as drawn)
GND on Top Layer "GND_L01_P000" (solid, remove dead copper, pour order 0): 8950.25,7048.44 8950.25,7441.25 9887,8378 11551,8378 12537,7392 12537,5670 11587,4720 9781,4720 8950.01,5550.99
GND on Bottom Layer "GND_L02_P002" (solid, remove dead copper, pour order 2): 8950.25,7046.44 8950.25,7439.25 9887,8376 11551,8376 12537,7390 12537,5668 11587,4718 9781,4718 8950.01,5548.99

## Keep-outs
Keep-Out Layer:
  circle w10: c11978.59,5227.8 r0.12
  lines w10: 8949.25,7595.13 9110.25,7595.13 9832.25,8317.13 9832.25,8503.13 9102.25,9233.13 8950.25,9233.13 ; 8949.25,11319.54 9110.25,11319.54 9832.25,12041.54 9832.25,12227.54 9102.25,12957.54 8950.25,12957.54 ; 8950.75,5673.27 9826.25,4797.77 9826.25,4718.54 8950.25,4718.54 ; 8950.75,14874.04 9826.25,15749.54 9826.25,15828.77 8950.25,15828.77 ; 12538.25,9252.22 12386.25,9252.22 11656.25,8522.22 11656.25,8336.22 12378.25,7614.22 12539.25,7614.22 ; 12540.25,12970.22 12388.25,12970.22 11658.25,12240.22 11658.25,12054.22 12380.25,11332.22 12541.25,11332.22 ; 12540.75,5673.27 11665.25,4797.77 11665.25,4718.54 12541.25,4718.54 ; 12540.75,14874.04 11665.25,15749.54 11665.25,15828.77 12541.25,15828.77 ; 12541.25,6460 12541.25,6612 ; 8950.25,4718.54 8753.4,4718.54 8753.4,15828.77 8950.25,15828.77 ; 8950.25,4718.54 8950.25,6050.01 ; 8950.25,6050.01 ccw(c10711.58,6549.23) 8950.25,7048.44 ; 8950.25,6050.01 8950.25,7048.44 ; 8950.25,7048.44 8950.25,8442.94 8950.25,9774.42 ; 8950.25,9774.42 ccw(c10711.58,10273.64) 8950.25,10772.85 ; 8950.25,9774.42 8950.25,10772.85 ; 8950.25,10772.85 8950.25,12167.35 8950.25,13498.83 ; 8950.25,13498.83 ccw(c10711.58,13998.04) 8950.25,14497.26 ; 8950.25,13498.83 8950.25,14497.26 ; 8950.25,14497.26 8950.25,15828.77 ; 12541.25,4718.54 12738.1,4718.54 12738.1,15828.77 12541.25,15828.77 ; 12541.25,4718.54 12541.25,15828.77

## Other copper
Top Layer:
  region net VIN1: 11726,6316 11824,6316 11834,6326 11834,6399 11857,6422 11857,6449 11904,6449 11907,6446 11907,6427 11875,6395 11875,6296 11854,6275 11796,6275 11787,6266 11787,6241 11781,6235 11730,6235 11726,6239
  region net NetL2_2: 11928,6383 11928,6398 11957,6427 11957,6447 12005,6447 12007,6445 12007,6426 11967,6386 11967,6383
  region net NetC49_2: 11943,6652 11943,6563 11957,6549 11957,6506 11960,6503 12005,6503 12008,6506 12008,6521 12035,6548 12035,6587 12028,6594 11991,6594 11978,6607 11978,6651 11977,6652
  region net 5V: 11908,6486 11834,6486 11826,6494 11826,6534 11855,6563 11907,6563 11910,6566 11910,6651 11887,6674 11852,6674 11844,6666 11844,6598 11795,6549 11795,6479 11809,6465 11908,6465
  region net NetJ3_3: 10912,8143 10905,8136 10905,8131 10929,8131 10929,8136 10922,8143
  region net 5V: 11352,7978 11401,7978 11409,7970 11409,7942 11406,7939 11352,7939 11348,7943 11348,7974
  region net VCC: 11610,6880 11685,6880 11690,6875 11690,6790 11678,6778 11611,6778 11605,6784 11605,6875
  region net VIN_GPRS: 10459,5938 10459,5887 10495,5851 10495,5780 10503,5772 10583,5772 10601,5790 10601,6107 10559,6107 10559,5962 10541,5944 10465,5944
  region net VIN_GPRS: 11520,5625 11435,5625 11425,5635 11425,5710 11430,5715 11515,5715 11520,5710
  region net NetL1_2: 10652,6101 10658,6107 10686,6107 10692,6101 10692,5987 10689,5984 10656,5984 10652,5988
  region net CAT.1_VCC: 10606,6123 10508,6123 10476,6091 9971,6091 9952,6072 9794,6072 9781,6085 9781,6139 9798,6156 10366,6156 10394,6184 10394,6292 10404,6302 10444,6302 10452,6294 10452,6273 10460,6265 10611,6265 10620,6256 10620,6231 10617,6228 10556,6228 10506,6228 10498,6220 10498,6150 10503,6145 10606,6145
  region net VIN1: 11552,5628 11552,5724 11527,5749 11527,5796 11497,5826 11497,5853 11503,5859 11629,5859 11636,5852 11636,5808 11606,5778 11606,5630 11604,5628
  region net VCC: 11402,5973 11402,6352 11409,6359 11464,6359 11472,6351 11472,6222 11448,6198 11448,5982 11439,5973
  region net VIN_GPRS: 10406,6390 10310,6390 10296,6376 10296,6340 10310,6326 10340,6326 10361,6347 10404,6347 10410,6353 10410,6386
  region net VIN_GPRS: 10595,6107 10526,6107 10515,6096 10515,6065 10525,6055 10591,6055 10601,6065 10601,6101
  region net VIN: 11463,5567 11710,5567 11749,5528 11952,5528 11957,5523 11957,5489 11952,5484 11483,5484 11463,5504
  region net CAT.1_VCC: 10197,6156 10197,6149 10200,6146 10249,6146 10250,6147 10254,6147 10256,6149 10256,6156 10247,6165 10206,6165
Bottom Layer:
  region net VIN1: 11727,6272 11777,6272 11782,6267 11782,6236 11781,6235 11727,6235 11724,6238 11724,6269
  region net 5V: 11852,6674 11878,6674 11881,6671 11881,6621 11878,6618 11845,6618 11844,6619 11844,6666
  region net 5V: 11352,7978 11401,7978 11409,7970 11409,7942 11406,7939 11352,7939 11348,7943 11348,7974
  region net VIN_GPRS: 11419,5801 11426,5794 11426,5635 11437,5624 11497,5624 11503,5630 11503,5854 11483,5874 10533,5874 10523,5864 10523,5815 10537,5801
  region net VCC: 10799,6230 10800,6229 10800,6211 10799,6210 10775,6210 10774,6211 10774,6229 10775,6230
  region net VCC: 10226,6071 10246,6071 10257,6060 10257,6034 10253,6030 10221,6030 10212,6039 10212,6057
  region net VIN1: 11533,5859 11591,5859 11596,5854 11596,5800 11591,5795 11532,5795 11529,5798 11529,5855
  region net VIN_GPRS: 10296,6377 10296,6139 10379,6056 10591,6056 10598,6063 10598,6096 10588,6106 10409,6106 10350,6165 10350,6379 10345,6384 10303,6384
Multi-Layer:
  pour cut-out: 11814,6407.5 11983,6407.5 11984.29,6406.21 11984.29,6239.52 11814.98,6239.52 11814,6240.5
  pour cut-out: 9366,7782 9366,6162 9373,6155 9677,6155 9688,6144 9688,5717 9838,5567 9838,5096 11621,5096 11621,4780 11550,4709 9474,4709 8950.25,5232.75 8950.25,7677.25 9056,7783
  pour cut-out: 10541,6041 10710,6041 10711.29,6039.71 10711.29,5873.02 10541.98,5873.02 10541,5874

## Silkscreen, mask and mechanical layers (free items; w line width, h text height)
Top Overlay:
  lines w10: 12192,5721 12245,5721 ; 12218,5694 12218,5747 ; 12350,6177 12403,6177 ; 12376,6150 12376,6203
  text "S" at 11775,7759 h50
  text "T" at 11816,7709 h50
  text "R" at 11857,7670 h50
  text "G" at 11903,7626 h50
  text "V" at 12239,7412 h50
  text "G" at 12238,7349 h50
  text "I" at 12248,7276 h50
  text "C" at 12238,7213 h50
  text "R" at 12238,7151 h50
Bottom Overlay:
  circle w10: c10711.57,5431.34 r157.48
  circle w10: c9786.84,6318.01 r0.12
  circle w10: c11853.31,6313.01 r0.12
  circle w10: c9452.61,7232.89 r0.12
  lines w10: 9451.73,6431.12 ccw(c9569.84,6431.12) 9569.84,6313.01 11853.31,6313.01 ccw(c11853.31,6431.12) 11971.42,6431.12 11971.42,7218.52 ccw(c11853.31,7218.52) 11853.31,7336.63 9569.84,7336.63 ccw(c9569.84,7218.52) 9451.73,7218.52 9451.73,6431.12
  text "S" at 11797,7760 h50
  text "T" at 11838,7710 h50
  text "R" at 11879,7671 h50
  text "G" at 11925,7627 h50
  text "V" at 12268,7407 h50
  text "G" at 12267,7344 h50
  text "I" at 12257,7274 h50
  text "C" at 12267,7208 h50
  text "R" at 12267,7146 h50
  text "WX0.012.615PCB-4.2" at 11447,5874 h40
  text "102010403-****" at 11441,5820 h40
  text "WLWc1-DP6" at 11441,5764 h40
  text "2026-2-25" at 11441,5708 h40
Mechanical 5:
  circle w0.25: c10333.27,12510.52 r0.12
  circle w0.25: c10619.88,12302.19 r0.12
  circle w0.25: c12307.29,16458.23 r0.12
  circle w0.25: c12307.29,13524.23 r0.12
  circle w0.25: c8715.25,14023.44 r0.12
  circle w0.25: c9209.56,14845.65 r0.12
  circle w0.25: c11743.59,12202.8 r0.12
  circle w0.25: c11824.56,12583.55 r0.12
  circle w0.25: c11934.35,12500.29 r0.12
  circle w0.25: c11879.46,9886.05 r0.12
  circle w0.25: c11879.46,12541.92 r0.12
  circle w0.25: c9073.7,12541.92 r0.12
  circle w0.25: c14649.57,12541.92 r0.12
  circle w0.25: c11879.46,12541.92 r0.12
  circle w0.25: c14522.1,13524.23 r0.12
  circle w0.25: c14662.26,13524.23 r0.12
  circle w0.25: c14522.1,13524.23 r0.12
  circle w0.25: c10476.58,15236.82 r0.12
  circle w0.25: c5584.1,12406.35 r0.12
  circle w0.25: c10476.58,12406.35 r0.12
  circle w0.25: c6431.06,13524.23 r0.12
  circle w0.25: c5245.85,13524.23 r0.12
  circle w0.25: c6431.06,13524.23 r0.12
  circle w0.25: c9334.84,13288.01 r0.12
  circle w0.25: c13503.61,13288.01 r0.12
  circle w0.25: c11618.31,13288.01 r0.12
  circle w0.25: c11618.31,14311.63 r0.12
  circle w0.25: c11736.42,15823.77 r0.12
  circle w0.25: c11736.42,14207.89 r0.12
  circle w0.25: c9217.61,14207.89 r0.12
  circle w0.25: c9444.56,7870.65 r0.12
  circle w0.25: c8950.25,7048.44 r0.12

## Text inside footprints (layer, text, board x,y; h text height)
C8: Top Overlay "+" at 12175.32,5828.9 h40 r270
C10: Top Overlay "+" at 12175.32,6156.9 h40 r270
LCD1: Bottom Overlay "1" at 11746.51,7420 h65; Bottom Overlay "24" at 9716.51,7420 h65